# Altium PCB living.PcbDoc
Units mil, origin at the board's own origin, x right, y up, seen from the top; angles counter-clockwise.
Board outline 1696.79 x 1980 mil, 2 copper layers (Top Layer, Bottom Layer); 34 components, 24 nets, 118 pads, 27 vias.
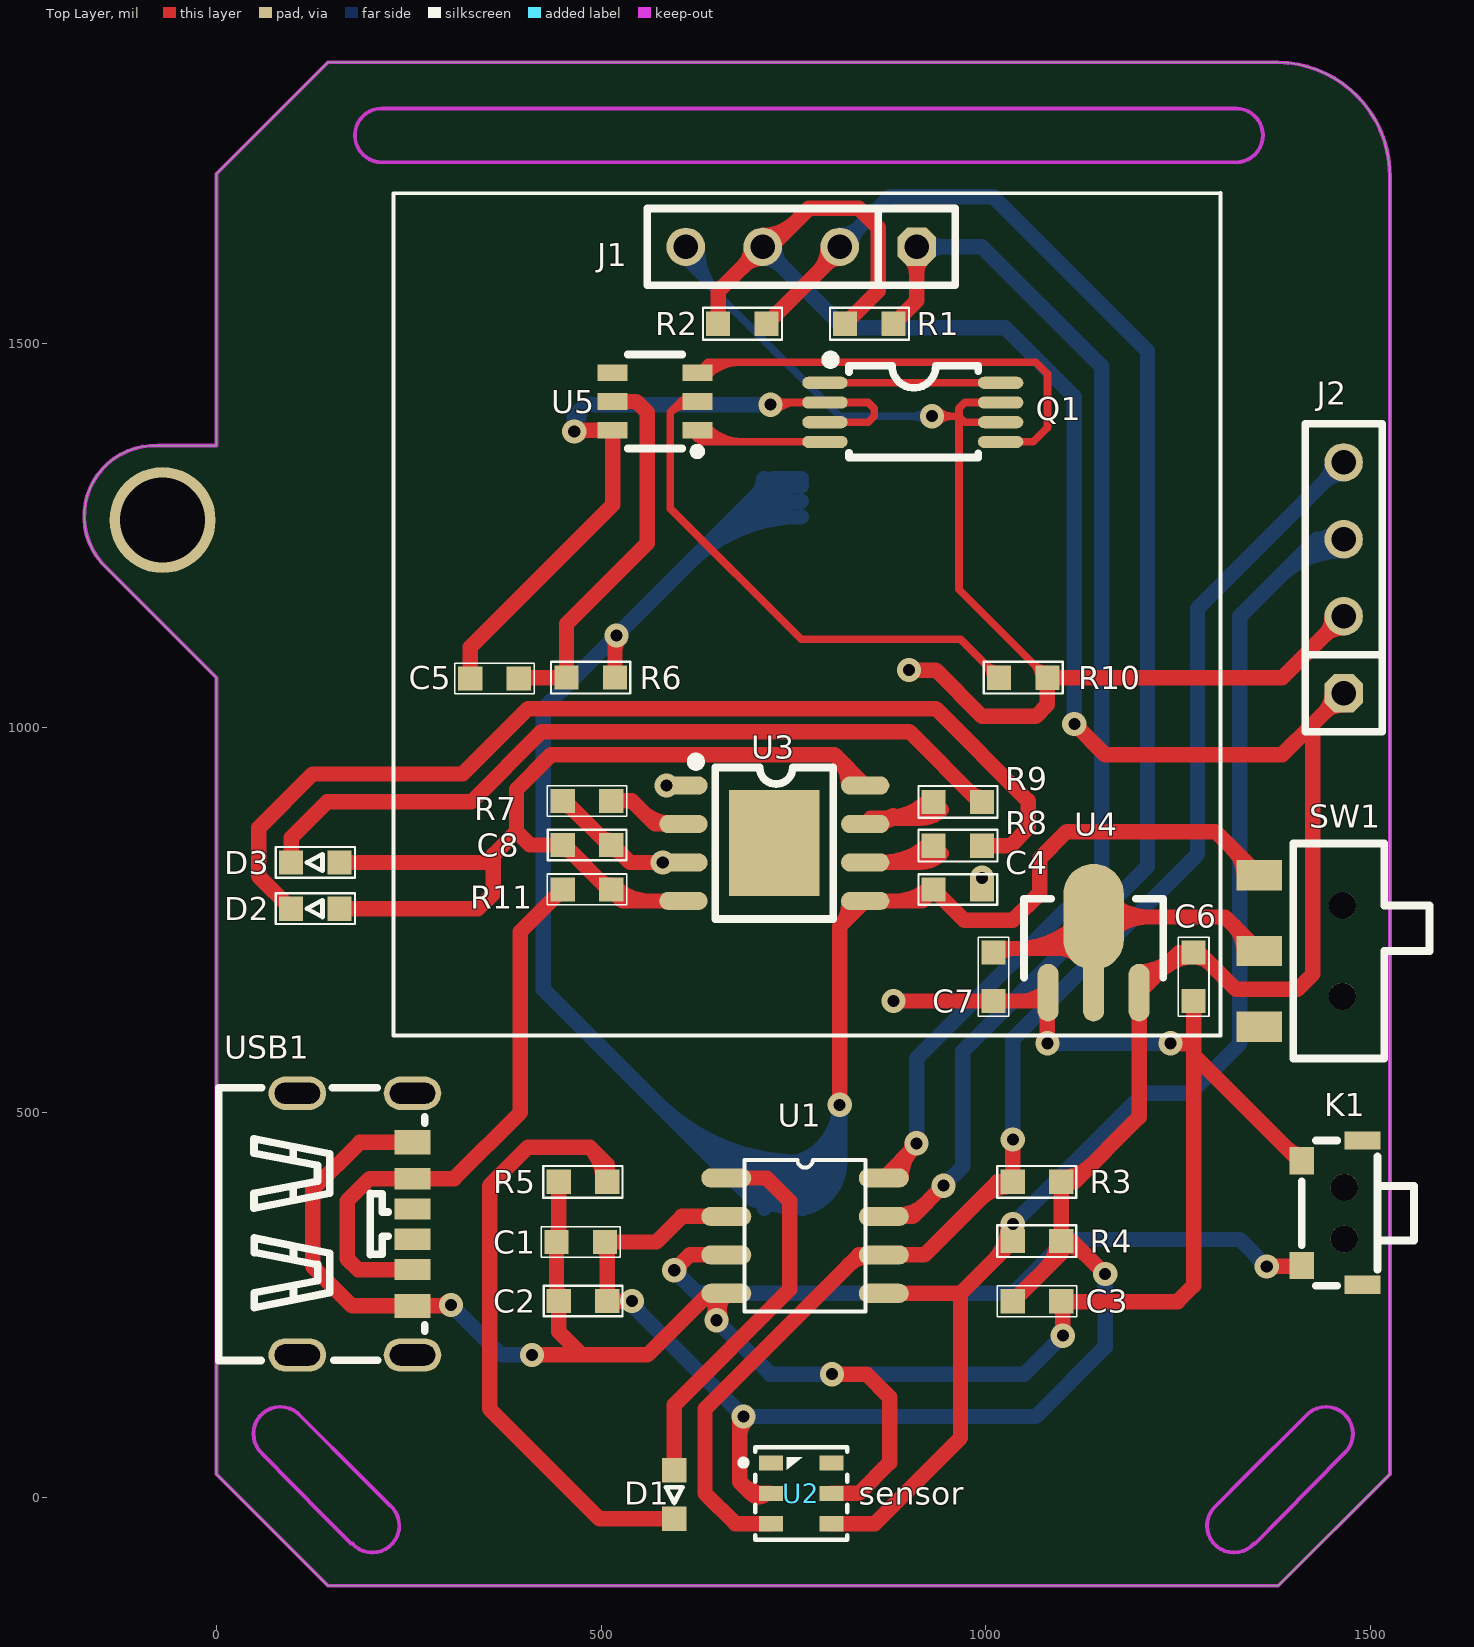
[diagram p0: Top Layer view]
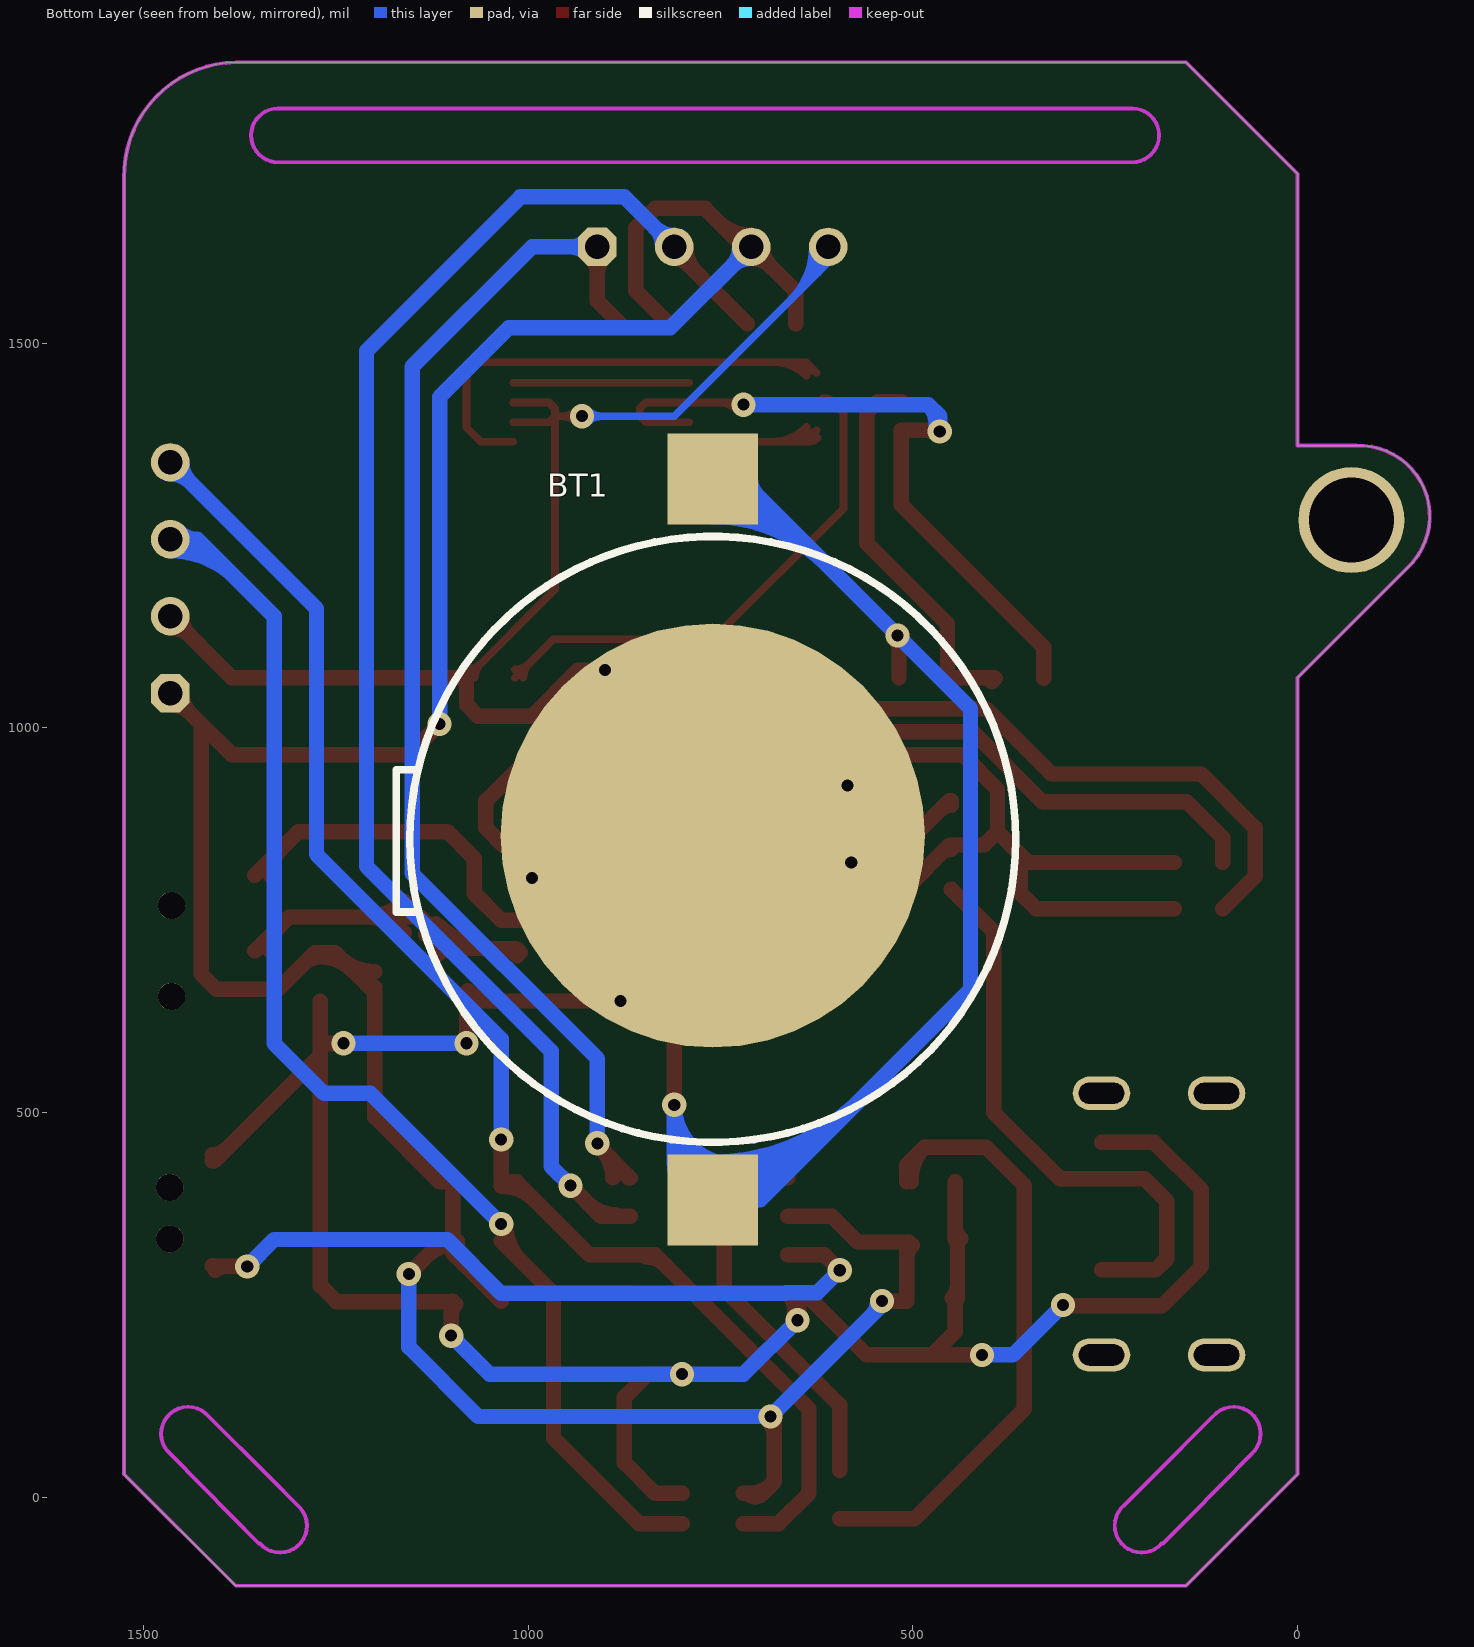
[diagram p1: Bottom Layer view, seen from below]

## Layer stack, top to bottom
Top Layer: signal copper 1.4
Dielectric: dielectric 12.6, FR-4, Dk 4.8
Bottom Layer: signal copper 1.4

## Board outline
0,30 145,-115 1380,-115 1525,30 1525,1715 ccw(c1377.5,1717.5) 1380,1865 145,1865 0,1720 0,1366.79 -76.2,1366.79 ccw(c-80,1275) -150.13,1215.66 -150.13,1215.13 0,1065

## Design rules (kind name [scope] priority, off if disabled: settings)
Clearance [All] p1: gap=10
PolygonConnect [All] p1: connectstyle=Relief reliefconductorwidth=10 reliefentries=4 polygonreliefangle="90 Angle" airgapwidth=10
RoutingVias [All] p1: holewidth=28 width=50 viastyle="Through Hole" minholewidth=28 minwidth=50 maxholewidth=28 maxwidth=50
SilkscreenOverComponentPads [All] p1: minsilkscreentomaskgap=10
SolderMaskExpansion [All] p1: expansion=4
Width [All] p1: maxlimit=30 minlimit=10 preferedwidth=20
27 further rules are at their usual default settings.

## Components (designator, comment, footprint, x,y, rotation, side; value= is the part's Value field where it differs from the comment)
BT1 "C70373" BAT-SMD_CR2032-3V 760,855 r180 bottom
C1 "C_0.1UF_0603" C_0603 505,331.72 r180 top
C2 "C_10UF_0603" CAP_0603_FIRE 445,255 r0 top
C3 "C_0.1UF_0603" C_0603 1035,254.74 r0 top
C4 "C_10UF_0603" CAP_0603_FIRE 995,789.74 r180 top
C5 "C_0.1UF_0603" C_0603 330,1064.03 r0 top
C6 "C_10UF_0603" C_0603 1270,645 r90 top
C7 "C_10UF_0603" C_0603 1010,645 r90 top
C8 "C_10UF_0603" CAP_0603_FIRE 513.18,847.72 r180 top
D1 "LED_BLUE_0603_FIRE" LED_BLUE_0603_FIRE 595,35 r270 top
D2 "LED_RED_0603_FIRE" LED_RED_0603_FIRE 160,765 r180 top
D3 "LED_RED_0603_FIRE" LED_RED_0603_FIRE 160,825 r180 top
J1 "CON4" SIP-4 910,1625 r180 top locked
J2 "CON4" SIP-4 1465,1045 r90 top
K1 "K2-1806SA-A3DW-04" KEY-SMD_K2-1806SA-AXXW-XX 1450,370 r270 top
Q1 "8205A" TSSOP-8_L4.4-W3.0-P0.65-LS6.4-BL 905,1410 r270 top
R1 "RES_4K7_0603_FIRE" RES_0603_FIRE 880,1525 r180 top
R2 "RES_4K7_0603_FIRE" RES_0603_FIRE 715,1525 r180 top
R3 "RES_4K7_0603_FIRE" RES_0603_FIRE 1035,410 r0 top
R4 "RES_4K7_0603_FIRE" RES_0603_FIRE 1035,333.01 r0 top
R5 "RES_4K7_0603_FIRE" RES_0603_FIRE 445,410 r0 top
R6 "RES_100R_0603_FIRE" RES_0603_FIRE 455,1065.32 r0 top
R7 "R_2.7K_0603" R_0603 450,905 r0 top
R8 "RES_1K_0603_FIRE" RES_0603_FIRE 995,846.7 r180 top
R9 "RES_1K_0603_FIRE" RES_0603_FIRE 995,903.71 r180 top
R10 "RES_1K_0603_FIRE" RES_0603_FIRE 1080,1065 r180 top
R11 "R_2.7K_0603" R_0603 450,790 r0 top
SW1 "SK-3390A-L1" SW-SMD_SK-3390A-L1 1355,710 r90 top
U1 "STC8G1K08" SOP8 765,340 r0 top
U2 "AHT20_C2757850" SENSOR-SMD_L3.0-W3.0-P1.00-BR 760,5 r180 top
U3 "TC4056A" SOP-8_L4.9-W3.9-P1.27-LS6.0-BL-EP 725,850 r270 top
U4 "HT7533-2" SOT-89-3_L4.5-W2.5-P1.50-LS4.2-BR 1140,705 r270 top
U5 "DW01_C686633" SOT-23-6_L2.9-W1.6-P0.95-LS2.8-BR 570,1424.14 r0 top
USB1 "TYPE-C 6P(073)" TYPE-C-SMD_TYPE-C-6P 180,355 r270 top

## Footprints (in the part's own frame and the unit in brackets; to place one, negate y for a bottom-side part, rotate by r counter-clockwise, add the part's x,y. Pads: shape width x height; smd on the part's side, far side on the other; paste and mask are expansions set on the pad)
BAT-SMD_CR2032-3V [mm]
  rect 3x3 smd: 1(0,-11.9) 1(0,11.9)
  round 14 smd: 2(0,0.127)
  silkscreen extent -10.45,-10 10,10
C_0603 [mm]
  rect 0.8x0.8 smd: 1(0,0) 2(1.6,0)
  silkscreen extent -0.51,-0.51 2.11,0.51
CAP_0603_FIRE [mm]
  rect 0.8x0.8 smd: 1(0,0) 2(1.6,0)
  silkscreen extent -0.5,-0.5 2.1,0.5
KEY-SMD_K2-1806SA-AXXW-XX [mm]
  rect 0.9x0.8 smd: 1(-1.71,-1) 2(1.75,-1)
  rect 0.6x1.2 smd: 3(-2.38,1) 4(2.38,1)
  round 0.9 hole 0.9 unplated: ""(-0.831,0.4) ""(0.871,0.4)
  silkscreen extent -2.38,-1 2.42,2.7
LED_BLUE_0603_FIRE [mm]
  rect 0.8x0.8 smd: A(0,0) K(1.6,0)
  silkscreen extent 0.56,-0.28 1.08,0.28
LED_RED_0603_FIRE [mm]
  rect 0.8x0.8 smd: A(0,0) K(1.6,0)
  silkscreen extent -0.51,-0.51 2.11,0.51
R_0603 [mm]
  rect 0.8x0.8 smd: 1(0,0) 2(1.6,0)
  silkscreen extent -0.51,-0.51 2.11,0.51
RES_0603_FIRE [mm]
  rect 0.8x0.8 smd: 1(0,0) 2(1.6,0)
  silkscreen extent -0.51,-0.53 2.1,0.52
SENSOR-SMD_L3.0-W3.0-P1.00-BR [mm]
  rect 0.8x0.5 smd: 1(1,-1) 2(1,0) 3(1,1) 4(-1,1) 5(-1,0) 6(-1,-1)
  silkscreen extent -1.52,-1.52 2,1.52
SIP-4 [mil]
  oct 50x50 hole 32: 1(0,0)
  round 50 hole 32: 2(100,0) 3(200,0) 4(300,0)
  silkscreen extent -50,-50 350,50
SOP8 [mil]
  oval 65x25 smd: 1(-102.36,75) 2(-102.36,25) 3(-102.36,-25) 4(-102.36,-75) 5(102.36,-75) 6(102.36,-25) 7(102.36,25) 8(102.36,75)
  silkscreen extent -79,-98 79,98
SOP-8_L4.9-W3.9-P1.27-LS6.0-BL-EP [mm]
  oval 0.6x1.598 smd: 1(-1.905,-3) 2(-0.635,-3) 3(0.635,-3) 4(1.905,-3) 5(1.905,3) 6(0.635,3) 7(-0.635,3) 8(-1.905,3)
  rect 3.5x3 smd: 9(0,0)
  silkscreen extent -2.84,-2.74 2.5,1.95
SOT-23-6_L2.9-W1.6-P0.95-LS2.8-BR [mm]
  rect 1x0.55 smd: 1(1.4,-0.95) 2(1.4,0) 3(1.4,0.95) 4(-1.4,0.95) 5(-1.4,0) 6(-1.4,-0.95)
  silkscreen extent -0.9,-1.78 1.52,1.55
SOT-89-3_L4.5-W2.5-P1.50-LS4.2-BR [mm]
  oval 1.9x0.7 smd: 1(1.25,-1.501) 3(1.25,1.501)
  oval 3.5x2 smd: 2(-1.25,0)
  oval 2.1x0.7 smd: 2(1.151,0)
  silkscreen extent -1.85,-2.3 0.75,2.3
SW-SMD_SK-3390A-L1 [mm]
  rect 1x1.5 smd: 1(-2.5,0) 2(0,0) 3(2.5,0)
  round 0.9 hole 0.9 unplated: ""(-1.5,-2.75) ""(1.5,-2.75)
  silkscreen extent -3.55,-5.63 3.55,-1.12
TSSOP-8_L4.4-W3.0-P0.65-LS6.4-BL [mm]
  oval 0.4x1.497 smd: 1(-0.975,-2.9) 2(-0.325,-2.9) 3(0.325,-2.9) 4(0.975,-2.9) 5(0.975,2.9) 6(0.325,2.9) 7(-0.325,2.9) 8(-0.975,2.9)
  silkscreen extent -1.89,-2.87 1.49,2.16
TYPE-C-SMD_TYPE-C-6P [mm]
  oval 1.1x1.9 hole 0.7 slot 1.5 at 90 deg: 7(-4.32,-1.9) 7(-4.32,1.9) 7(4.32,-1.9) 7(4.32,1.9)
  rect 0.7x1.2 smd: A5(-0.5,1.9) A9(1.5,1.9) B5(0.5,1.9) B9(-1.5,1.9)
  rect 0.8x1.2 smd: A12(2.7,1.9) B12(-2.7,1.9)
  silkscreen extent -4.5,-4.5 4.5,2.3

## Part data
D1: "blue,0603"
D3: "red,0805"
J1 J2: "Con"
K1: library part K2-1806SA-A
R1 R2 R3 R4 R5 R6 R8 R9 R10: "0402"
U1: library part STC15W201S_SOP8

## Free pads (board coordinates)
  round 137.8 hole 110.24: 0(-70,1270)

## Via types
v1: diameter 31.5, hole 15.75, Top Layer to Bottom Layer, 27 vias

## Nets (pads, with @x,y where several pads share a name; then routed paths per layer and width w, separated by ;. In a path a pad name is that pad's centre, name@x,y a point inside that pad or via, vN(x,y) a via of type N, cw(c..) or ccw(c..) an arc to the next point about the centre after c; other vN are vias at no path point)
BAT: BT1.1 C4.2 R6.2 SW1.3 U3.5 | length 3947.2
  Top Layer w20: R6.2 517.99,1117.99 v1(520,1120) ; 517.99,1101.28 cw(c538.72,1101.28) v1@524.06,1115.94 ; v1(810,510) 810,741.89 ; U3.5@821.66,774.81 cw(c781.31,770.58) 810,741.89 ; U3.5@839.66,771.55 ccw(c835,776.21) U3.5@841.56,776.9 ; 882.55,775 ccw(c882.55,839.19) C4.2@927.94,793.8 ; 1321.67,841.76 cw(c1288.33,808.43) SW1.3@1335.47,808.43 ; SW1.3 1298.43,865 1105,865 1070,830 1070,785 1035,750 971.74,750 C4.2 917.27,775 U3.5 810,741.89
  Bottom Layer w20: 571.28,513.72 ccw(c760,702.43) BT1.1@760,435.55 ; 605.42,479.58 ccw(c760,634.15) BT1.1@760,415.55 ; 613.96,1213.96 cw(c760,1067.92) BT1.1@760,1274.45 ; 639.57,445.43 ccw(c760,565.87) BT1.1@760,395.55 ; 648.1,1248.1 cw(c760,1136.21) BT1.1@760,1294.45 ; 673.71,411.29 ccw(c760,497.58) BT1.1@760,375.55 ; 682.24,1282.24 cw(c760,1204.49) BT1.1@760,1314.45 ; BT1.1@702.06,1302.06 ccw(c680.62,1323.51) BT1.1@710.95,1323.51 ; BT1.1@712.17,375.59 ccw(c698.51,372.48) 698.51,386.49 ; BT1.1@712.17,397.39 cw(c698.51,400.51) 698.51,386.49 ; BT1.1@749.35,434.38 ccw(c732.53,510) v1(810,510) 810,436.49 760,386.49 698.51,386.49 ; BT1.1@753.69,414.86 ccw(c738.08,485.06) 810,485.06 ; BT1.1@758.03,395.33 ccw(c743.63,460.12) 810,460.12 ; BT1.1@760,1323.51 723.51,1323.51 v1(520,1120) 425,1025 425,660 698.51,386.49 ; BT1.1@762.38,375.81 ccw(c749.17,435.19) BT1.1@810,435.19
GND: BT1.2 C1.2 C2.1 C3.2 C4.1 C6.1 C7.1 C8.1 J1.4 J2.2 K1.1 Q1.6 Q1.7 R5.1 R7.1 R10.1 U1.4 U2.5 U3.1 U3.3 U4.1 USB1.A12 USB1.B12 | length 5643.1
  Top Layer w10: v1(930,1405) 965,1405 ; v1@937.6,1397.4 cw(c955.95,1379.05) 955.95,1405 cw(c955.95,1430.95) v1@937.6,1412.6 ; Q1.6 972.8,1397.2 965,1405 ; Q1.7 972.8,1422.8 965,1415 965,1405 ; R10.1@1069.25,1065 ccw(c1043.3,1065) 1061.65,1083.35 ccw(c1080,1101.7) R10.1@1080,1075.75 ; R10.1 965,1180 965,1405
  Top Layer w20: USB1.B12 186.3,461.3 125,400 125,300 176.3,248.7 USB1.A12 v1@303.7,248.7 ; 287.99,248.7 ccw(c287.99,267.01) v1@300.94,254.06 ; v1(410,185) 475,185 ; C1.2@437.94,335.79 ccw(c420.91,352.82) 445,352.82 ; 442.01,276.1 ccw(c466.1,276.1) C2.1@449.06,259.06 ; R5.1 445,334.72 C1.2 442.01,257.99 C2.1 445,215 475,185 ; R7.1@450,899.25 cw(c450,878.88) R7.1@464.4,893.29 ; R7.1 452.69,905 509.97,847.72 C8.1 515.05,847.72 537.77,825 U3.3 ; C8.1@497.88,859.81 ccw(c513.18,875.1) C8.1@513.18,853.47 ; C8.1@513.18,841.98 cw(c513.18,823.58) C8.1@526.18,836.59 ; U1.4@640.87,263.23 cw(c618.83,241.19) v1@650,241.19 ; U1.4@641.7,262.68 cw(c636.72,250.37) 650,250.37 ; v1@645.02,232.87 ccw(c624.44,244.76) 647.4,250.91 ; v1(650,230) 650,252.36 U1.4 ; v1@655.39,231.99 cw(c684.8,242.84) U1.4 ; U2.5 835,5 875,45 875,130 845,160 v1(800,160) ; v1(880,645) C7.1 1070.1,645 U4.1@1080,654.9 ; v1(900,1075) 935,1075 995,1015 1065,1015 1080,1030 R10.1 1385,1065 J2.2 ; 1045.7,645 ccw(c1045.7,691) U4.1@1078.23,658.47 ; v1(1080,590) U4.1@1080,654.9 ; U4.1 U4.1@1080,654.9 ; C3.2@1093.93,250.67 cw(c1079.27,236.01) 1100,236.01 ; C3.2 C3.2@1098.48,254.25 ; v1(1100,210) 1100,252.73 C3.2@1098.48,254.25 ; v1(1240,590) 1265,590 1270,595 ; v1@1243.84,594.28 ccw(c1256.54,608.46) 1270,595 ; C6.1 1270,595 ; 1392.42,452.58 ccw(c1410.63,470.79) K1.1@1410.63,445.04 ; K1.1 1407.68,437.32 1270,575 ; J2.2@1450,1145 cw(c1413.79,1145) 1439.39,1119.39 cw(c1465,1093.79) J2.2@1465,1130 ; 475,185 560,185 640,265 U1.4 ; C3.2@1098.48,254.25 1249.25,254.25 1270,275 1270,575 ; 1270,575 1270,595
  Bottom Layer w10: J1.4@620,1625 ccw(c692.43,1625) 641.21,1573.79 ; 624.14,1590.86 cw(c658.28,1625) J1.4 610,1605 810,1405 v1(930,1405) ; J1.4@630,1625 ccw(c726.57,1625) 658.28,1556.72 ; v1@922.4,1397.4 ccw(c904.05,1379.05) 904.05,1405 ccw(c904.05,1430.95) v1@922.4,1412.6
  Bottom Layer w20: v1(305,250) 370,185 v1(410,185) ; v1(650,230) 720,160 v1(800,160) 1050,160 v1(1100,210) ; v1(1080,590) v1(1240,590)
  other v1: 995,805 580,825 585,925
NetC5_1: C5.1 Q1.2 Q1.3 U5.6 | length 1040.7
  Top Layer w10: v1(720,1420) 722.8,1422.8 Q1.2 847.2,1422.8 855,1415 855,1405 847.2,1397.2 Q1.3 ; v1@727.6,1412.4 cw(c752.71,1387.29) 752.71,1422.8 ; v1@727.6,1427.6 ccw(c739.19,1439.19) 739.19,1422.8
  Top Layer w20: C5.1 330,1105 514.88,1289.88 U5.6 466.74,1386.74 v1(465,1385) ; v1@469.06,1380.94 cw(c483.07,1366.93) 483.07,1386.74
  Bottom Layer w20: v1(465,1385) 465,1405 480,1420 ; v1@470.58,1386.36 cw(c505.18,1394.81) 480,1420 ; v1(720,1420) 480,1420
NetC5_2: C5.2 R6.1 U5.5 | length 516
  Top Layer w20: C5.2 394.28,1065.32 R6.1 455,1135 560,1240 560,1410 545.86,1424.14 U5.5 ; C5.2@397.06,1059.96 cw(c409.98,1047.04) 409.98,1065.32
NetC8_2: C8.2 D2.A D3.A R11.2 U3.4 U3.8 | length 1428.3
  Top Layer w20: D2.A 340,765 360,785 360,835 ; D3.A 350,825 360,835 ; C8.2@450.19,841.98 cw(c450.19,823.58) C8.2@463.19,836.59 ; R11.2@497.7,802.08 ccw(c512.99,817.38) R11.2@512.99,795.75 ; R11.2@517.06,794.06 ccw(c563.08,840.09) 563.08,775 ; U3.4 527.99,775 R11.2 509.78,790 452.06,847.72 C8.2 407.28,847.72 390,865 ; 806.48,961.63 cw(c769.86,925) U3.8@821.65,925 ; U3.8@840.63,927.48 cw(c838.14,925) U3.8@841.65,925 ; U3.8 803.11,965 435,965 390,920 390,865 ; 360,835 390,865
NetD1_K: D1.K R5.2 | length 843.8
  Top Layer w20: R5.2@502.25,410.28 ccw(c443.19,413.18) 485,455 ; R5.2 507.99,432.01 485,455 ; D1.K 497.99,-27.99 355,115 355,405 405,455 485,455
NetD2_K: D2.K R8.1 | length 1341
  Top Layer w20: D2.K 55,807.01 55,870 125,940 320,940 405,1025 935,1025 1055,905 1055,870 1031.7,846.7 R8.1
NetD3_K: D3.K R9.1 | length 1042
  Top Layer w20: D3.K 97.01,857.01 143.71,903.71 331.29,903.71 422.57,995 900.5,995 991.79,903.71 R9.1 ; R9.1@979.7,915.8 ccw(c995,931.09) R9.1@995,909.46
NetJ1_1: J1.1 R1.1 U1.8 | length 1765.9
  Top Layer w20: U1.8 910,457.64 v1(910,460) ; U1.8@869.86,415 cw(c875.9,415) U1.8@871.63,419.27 ; R1.1 910,1555 J1.1 ; U1.8@889.86,415 cw(c944.18,415) v1@905.77,453.41 ; 898.52,446.15 ccw(c884.67,460) v1@904.25,460 ; J1.1@899.39,1614.39 cw(c873.79,1588.79) 910,1588.79 cw(c946.21,1588.79) J1.1@920.61,1614.39
  Bottom Layer w20: v1(910,460) 910,570 1150.75,810.75 1150.75,1469.25 995,1625 J1.1 ; J1.1@920.61,1614.39 cw(c946.21,1588.79) 946.21,1625 cw(c946.21,1661.21) J1.1@920.61,1635.61
NetJ1_2: J1.2 R2.1 U1.7 | length 2090
  Top Layer w20: R2.1 810,1620 J1.2 ; 780.86,1590.86 ccw(c746.72,1625) J1.2@795,1625 ; 792.93,1602.93 cw(c810,1585.86) J1.2@810,1610 ; U1.7 905,365 v1(945,405) ; U1.7@887.36,367.5 ccw(c887.36,416.12) 921.74,381.74
  Bottom Layer w20: J1.2 875,1690 1010,1690 1210,1490 1210,820 970,580 970,430 v1(945,405) ; J1.2@810,1640 ccw(c810,1676.21) 835.61,1650.61 ccw(c861.21,1625) J1.2@825,1625
NetQ1_1: Q1.1 Q1.8 | length 228.3
  Top Layer w10: Q1.1 Q1.8
NetQ1_4: Q1.4 U5.1 | length 283.1
  Top Layer w10: U5.1@623.95,1376.71 ccw(c636.3,1389.06) 636.3,1371.6 ; U5.1 640.25,1371.6 ; U5.1@631.02,1383.78 ccw(c660.44,1413.2) 660.44,1371.6 ; U5.1@638.09,1390.85 ccw(c684.58,1437.34) 684.58,1371.6 ; U5.1@638.9,1383.63 ccw(c647.11,1378.46) 640.25,1371.6 ; Q1.4 640.25,1371.6
NetQ1_5: Q1.5 U5.3 | length 691
  Top Layer w10: U5.3 638.58,1475 ; U5.3@631.02,1464.49 cw(c656.39,1439.13) 656.39,1475 ; U5.3@638.09,1457.42 cw(c680.53,1414.99) 680.53,1475 ; U5.3@638.31,1465.43 cw(c643.5,1470.08) 638.58,1475 ; Q1.5 1061.6,1371.6 1080,1390 1080,1460 1065,1475 638.58,1475
NetR7_2: R7.2 U3.2 | length 142.5
  Top Layer w20: R7.2 540,905 570,875 U3.2 ; 554.71,890.29 ccw(c587.25,922.82) U3.2@587.25,876.81
NetR8_2: R8.2 U3.6 | length 195.5
  Top Layer w20: U3.6 843.59,825.48 910.79,825.48 R8.2 ; U3.6@866.91,825.48 ccw(c866.91,911.8) R8.2@927.94,850.77 ; 915.19,825.48 ccw(c915.19,863.51) R8.2@942.09,836.62
NetR9_2: R9.2 U3.7 | length 242
  Top Layer w20: U3.7 850.56,882.45 910.74,882.45 R9.2 ; U3.7@864.04,873.72 cw(c885.11,852.64) 885.11,882.45 ; U3.7@864.32,874.09 cw(c886.29,861.41) 879.73,885.91 ; U3.7@866.8,882.45 ccw(c866.8,968.92) R9.2@927.94,907.78 ; 915.08,882.45 ccw(c915.08,920.64) R9.2@942.09,893.63
NetR10_2: R10.2 U5.2 | length 784
  Top Layer w10: 604.03,1424.03 cw(c614.65,1413.41) U5.2@616.87,1428.27 ; U5.2@611.71,1420.5 ccw(c604.14,1414.45) 604.14,1424.14 ; U5.2@611.71,1427.78 cw(c604.14,1433.83) 604.14,1424.14 ; U5.2@615.4,1418.38 ccw(c611.01,1389) 590,1410 ; U5.2 604.14,1424.14 ; R10.2@1006.26,1065 ccw(c980.31,1065) 998.66,1083.35 ccw(c1017.01,1101.7) R10.2@1017.01,1075.75 ; R10.2 967.01,1115 760,1115 590,1285 590,1410 ; 590,1410 604.14,1424.14
P30: J2.3 R4.1 U1.5 U2.4 | length 1979.6
  Top Layer w20: U2.4 855.63,-34.37 966.99,76.99 966.99,265 ; U1.5 966.99,265 ; 1009.64,307.65 ccw(c962.29,355) v1@1029.25,355 ; R4.1 966.99,265
  Bottom Layer w20: v1(1035,355) 1205,525 1265,525 1330,590 1330,1145 1430,1245 ; 1379.64,1194.64 cw(c1465,1109.29) J2.3@1465,1230 ; 1413.79,1228.79 cw(c1465,1177.57) J2.3@1465,1250 ; J2.3@1454.14,1234.66 ccw(c1430,1211.67) 1430,1245 ; J2.3@1454.14,1255.34 cw(c1430,1278.33) 1430,1245 ; J2.3 1430,1245
P31: J2.4 R3.1 U1.6 U2.3 | length 1981.1
  Top Layer w20: U2.3 674.37,-34.37 635,5 635,115 835,315 U1.6 920,315 1015,410 R3.1 v1(1035,465) ; 821.99,301.99 cw(c847.36,276.62) U1.6@847.36,312.5 ; 991.05,386.05 cw(c1035,342.09) R3.1@1035,404.25
  Bottom Layer w20: v1(1035,465) 1035,595.56 1275,835.56 1275,1155 J2.4 ; J2.4@1450,1345 cw(c1413.79,1345) 1439.39,1319.39 cw(c1465,1293.79) J2.4@1465,1330
P54: D1.A U1.1 | length 506.9
  Top Layer w20: D1.A 595,120 745,270 745,385 715,415 U1.1
P55: K1.2 U1.3 | length 961.1
  Top Layer w20: v1(595,295) 615,315 U1.3 ; v1(1365,300) 1409.53,300 K1.2 ; 1394.66,300 cw(c1394.66,283.17) K1.2@1406.57,295.07
  Bottom Layer w20: v1(595,295) 624.25,265.75 664.81,265.75 665.56,265 1035,265 1105,335 1330,335 v1(1365,300)
VBAT: C7.2 SW1.2 U4.2 | length 755.7
  Top Layer w20: C7.2 1015.21,713.2 1099,713.2 ; C7.2@1014.06,703.93 cw(c1036.45,681.54) 1036.45,713.2 ; 1041.4,713.2 ccw(c1041.4,823.27) U4.2@1119.23,745.44 ; 1089.68,713.2 ccw(c1089.68,774.99) U4.2@1133.37,731.3 ; 1096.79,713.2 cw(c1096.79,681.46) U4.2@1119.23,703.91 ; U4.2@1110.63,724.78 cw(c1099,724.83) 1099,713.2 ; U4.2@1118.46,704.71 ccw(c1099,686.67) 1099,713.2 ; U4.2@1160.77,733.43 cw(c1210.91,683.29) 1210.91,754.2 cw(c1210.91,825.11) U4.2@1160.77,774.97 ; 1321.67,743.34 cw(c1288.33,710) SW1.2@1335.47,710 ; SW1.2 1310.8,754.2 1140,754.2 1099,713.2
VCC: C1.1 C2.2 C3.1 C6.2 J1.3 J2.1 R1.2 R2.2 R3.2 R4.2 U1.2 U2.2 U4.3 | length 4738.3
  Top Layer w20: C1.1@500.94,327.66 cw(c483.9,310.62) 507.99,310.62 ; v1(540,255) C2.2 507.99,328.73 C1.1 571.72,331.72 605,365 U1.2 ; R2.2 652.01,1567.01 J1.3 720,1625 770,1675 835,1675 860,1650 860,1567.99 R1.2 ; 680,79.05 cw(c710.95,79.05) v1@689.06,100.94 ; 681.33,18.67 ccw(c714.72,52.06) U2.2@714.72,4.84 ; v1(685,105) 680,100 680,20 695,5 ; J1.3@695,1625 cw(c658.79,1625) 684.39,1599.39 cw(c710,1573.79) J1.3@710,1610 ; J1.3@710,1640 ccw(c710,1700.36) 752.68,1657.68 ; U2.2@714.83,4.88 cw(c704.98,14.97) 695,5 ; U2.2 695,5 ; C3.1 1097.99,317.73 R4.2 ; 1077.37,297.11 ccw(c1041.47,333.01) R4.2@1092.24,333.01 ; R4.2@1097.99,327.26 cw(c1097.99,279.6) 1131.7,313.3 ; R3.2@1097.99,415.75 ccw(c1097.99,470.69) 1136.84,431.84 ; v1(1115,1005) 1155,965 1385,965 1425,1005 ; v1(1155,290) 1111.99,333.01 R4.2 ; U4.3@1199.1,663.2 ccw(c1199.1,681.07) U4.3@1211.74,668.44 ; U4.3@1199.1,683.2 ccw(c1199.1,749.35) 1245.88,702.58 ; 1228.25,684.95 cw(c1270,643.2) 1270,702.24 cw(c1270,671.45) 1291.78,693.22 ; J2.1@1450,1045 cw(c1413.79,1045) 1439.39,1019.39 cw(c1465,993.79) J2.1@1465,1030 ; J2.1 1425,1005 ; R4.2 R3.2 1115,410 1199.1,494.1 U4.3 1251.29,707.99 C6.2 1277.01,707.99 1325,660 1405,660 1425,680 1425,1005
  Bottom Layer w20: v1(540,255) 540,250 v1(685,105) 1065,105 1155,195 v1(1155,290) ; v1@545.75,255 ccw(c571.7,255) 553.35,236.65 ; J1.3@710,1610 cw(c710,1573.79) 735.61,1599.39 cw(c761.21,1625) J1.3@725,1625 ; J1.3 815,1520 1025,1520 1115,1430 v1(1115,1005)
VCC_5V: R11.1 USB1.A9 USB1.B9 | length 751
  Top Layer w20: USB1.A9 184.06,295.95 170,310 170,385 199.06,414.06 USB1.B9 309.06,414.06 395,500 395,735 R11.1
pads on no net: K1. K1.3 K1.4 SW1. SW1.1 U2.1 U2.6 U3.9 U5.4 USB1.7 USB1.A5 USB1.B5

## Keep-outs
Keep-Out Layer:
  lines w5: -150.13,1215.13 0,1065 0,980 0,30 145,-115 1380,-115 1525,30 1525,1715 ccw(c1377.5,1717.5) 1380,1865 145,1865 0,1720 0,1395 0,1366.79 -76.2,1366.79 ccw(c-80,1275) -150.13,1215.66 ; 175,-60 140,-25 60.68,55.68 cw(c83.08,82.56) 109.66,105.34 190,25 225,-10 cw(c202.59,-36.89) 176.02,-59.67 ; 1348.98,-59.67 cw(c1322.41,-36.89) 1300,-10 1335,25 1415.34,105.34 cw(c1441.92,82.56) 1464.32,55.68 1385,-25 1350,-60 ; 180,1770 cw(c215,1770) 215,1805 1325,1805 cw(c1325,1770) 1360,1770 cw(c1325,1770) 1325,1735 215,1735 cw(c215,1770) 180,1770

## Silkscreen, mask and mechanical layers (free items; w line width, h text height)
Top Overlay:
  lines w5: 230.2,600 1305,600 1305,1695 230.2,1694.49 230.2,600
  text "sensor" at 835,-10 h30